# EAGLE board Motherboard (EAGLE 9.3.0)

Size 87.5 x 150 mm. Coordinates in mm from the lower left corner, seen from the top.
Outline: 3,0 84.5,0 arc90 87.5,3 87.5,147 arc90 84.5,150 3,150 arc90 0,147 0,3 arc90 3,0
Copper layers (1*16): Top 0.035mm / dielectric 1.5mm / Bottom 0.035mm
Design rules "default": minimum track width 6mil, minimum drill 0.35mm, track to track 6mil, track to pad 6mil, pad to pad 6mil, via to via 6mil, smd to smd 6mil, copper to edge 40mil, drill to drill 6mil, minimum pad ring 10mil, minimum via ring 8mil, stop-mask expansion 4mil, vias tented up to drill 0mil, thermal gap 10mil
Holes 5.5 mm at 9.75,140 10,9.75 77.75,10 77.75,140
bRestrict: area 58.1,140.9 to 58.2,141.4; area 59.1,139.9 to 59.6,140; area 59.1,138.5 to 59.6,138.6

## Footprints (pad centres in the part's own frame; a part is rotated, then mirrored left to right if it is on the bottom)
1X05_ROUND_70 = drill 1 pad 1.778 square: 1 -5.08,0 | drill 1 pad 1.778: 2 -2.54,0; 3 0,0; 4 2.54,0; 5 5.08,0
ARDUINO_NANO = drill 0.8 square: 1 -20.32,-7.62 | drill 0.8: 2 -17.78,-7.62; 3 -15.24,-7.62; 4 -12.7,-7.62; 5 -10.16,-7.62; 6 -7.62,-7.62; 7 -5.08,-7.62; 8 -2.54,-7.62; 9 0,-7.62; 10 2.54,-7.62; 11 5.08,-7.62; 12 7.62,-7.62; 13 10.16,-7.62; 14 12.7,-7.62; 15 15.24,-7.62; 16 15.24,7.62; 17 12.7,7.62; 18 10.16,7.62; 19 7.62,7.62; 20 5.08,7.62; 21 2.54,7.62; 22 0,7.62; 23 -2.54,7.62; 24 -5.08,7.62; 25 -7.62,7.62; 26 -10.16,7.62; 27 -12.7,7.62; 28 -15.24,7.62; 29 -17.78,7.62; 30 -20.32,7.62 | hole 1.778: -22.86,-7.62; -22.86,7.62; 17.78,7.62; 17.78,-7.62
1X09_ROUND_70 = drill 1 pad 1.778: 1 -10.16,0; 2 -7.62,0; 3 -5.08,0; 4 -2.54,0; 5 0,0; 6 2.54,0; 7 5.08,0; 8 7.62,0; 9 10.16,0
YOSTLABSIMU = smd 0.813 x 1.676: \SS 16.81,-5.05; GND 2.47,2.31; MISO 16.81,-0.16; MOSI 16.8,-2.68; RX 16.84,4.75; SCK 16.85,2.25; SCL 2.45,7.22; SDA 2.46,4.73; TX 16.81,7.17; USBD+ 2.5,-2.77; USBD- 2.5,-0.2; VIN 2.51,-5.22
2X8 = drill 1.016 pad 1.88: 1 0,0; 2 0,2.54; 3 2.54,0; 4 2.54,2.54; 5 5.08,0; 6 5.08,2.54; 7 7.62,0; 8 7.62,2.54; 9 10.16,0; 10 10.16,2.54; 11 12.7,0; 12 12.7,2.54; 13 15.24,0; 14 15.24,2.54; 15 17.78,0; 16 17.78,2.54
SCREWTERMINAL-3.5MM-2 = drill 1.2 pad 2.032 square: 1 0,0 | drill 1.2 pad 2.032: 2 3.5,0
R0603 = smd 1 x 1.1: 1 -0.85,0; 2 0.85,0
RADIO = hole 2.6: -18.47,-0.59; 18.13,11.51; 18.13,-12.69
MOUNTINGHOLE_2.5_PLATED = drill 2.5 pad 3.2: P$1 0,0

## Placement (x,y rotation side)
ALTIMETER2  [1X05_ROUND_70]  35.01,112.69 90 top
ARDUINO_NANO1  [ARDUINO_NANO]  45.31,93.16 0 top
GPS2  [1X09_ROUND_70]  59.38,136.09 270 top
IMU  YOSTLABSIMU  [YOSTLABSIMU]  43.94,112.21 0 top
J1  [2X8]  45,75 0 top
J2  [SCREWTERMINAL-3.5MM-2]  29,77 270 top
R_SCL  [R0603]  22.44,125.7 0 top
R_SDA  [R0603]  22.44,128.89 0 top
U$1  [RADIO]  53.22,43.53 90 top
U$3  MOUNTINGHOLE2.5  [MOUNTINGHOLE_2.5_PLATED]  29.66,125.93 90 top
U$4  MOUNTINGHOLE2.5  [MOUNTINGHOLE_2.5_PLATED]  29.66,146.25 90 top

## Library data of the parts
ALTIMETER2 GPS2 = microbuilder
ARDUINO_NANO1 U$1 = ArduinoNanoV30
IMU = YOST LABS IMU
J1 = SparkFun-Connectors
J2 = SparkFun-Connectors; PROD_ID: CONN-08399
R_SCL R_SDA = rcl; SPICEPREFIX: R
U$3 U$4 = microbuilder; BOM: EXCLUDE

## Nets
3V3: ALTIMETER2.1 ARDUINO_NANO1.2 GPS2.1 IMU.VIN R_SCL.1 R_SDA.1
5V: ARDUINO_NANO1.12
GND: ALTIMETER2.3 ARDUINO_NANO1.14 ARDUINO_NANO1.19 GPS2.7 IMU.GND
RX: ARDUINO_NANO1.21 GPS2.5
SCL: ALTIMETER2.4 ARDUINO_NANO1.9 IMU.SCL R_SCL.2
SDA: ALTIMETER2.5 ARDUINO_NANO1.8 IMU.SDA R_SDA.2
TX: ARDUINO_NANO1.20 GPS2.6
VIN: ARDUINO_NANO1.15

## Tracks (layer width: path | path; a pad name or v marks a point on that pad's centre or on a via)
3V3  (5 unrouted)
GND  (4 unrouted)
RX  (1 unrouted)
SCL  (3 unrouted)
SDA  (3 unrouted)
TX  (1 unrouted)
(copper drawn outside any net)
  shapes: Top area x5

## Text on the board
tPlace: PPS | VIN | GND | RX | TX | FIX | VBAT | EN | 3.3V | SDA | SCL | GND | 3Vo | VIN